# Altium PCB Power Supply PCB.PcbDoc
Units mm, origin at the board's own origin, x right, y up, seen from the top; angles counter-clockwise.
Board outline 116.46 x 103.76 mm, 2 copper layers (Top Layer, Bottom Layer); 60 components, 32 nets, 151 pads, 0 vias.
Unrouted connection lines stored in the file: 14.
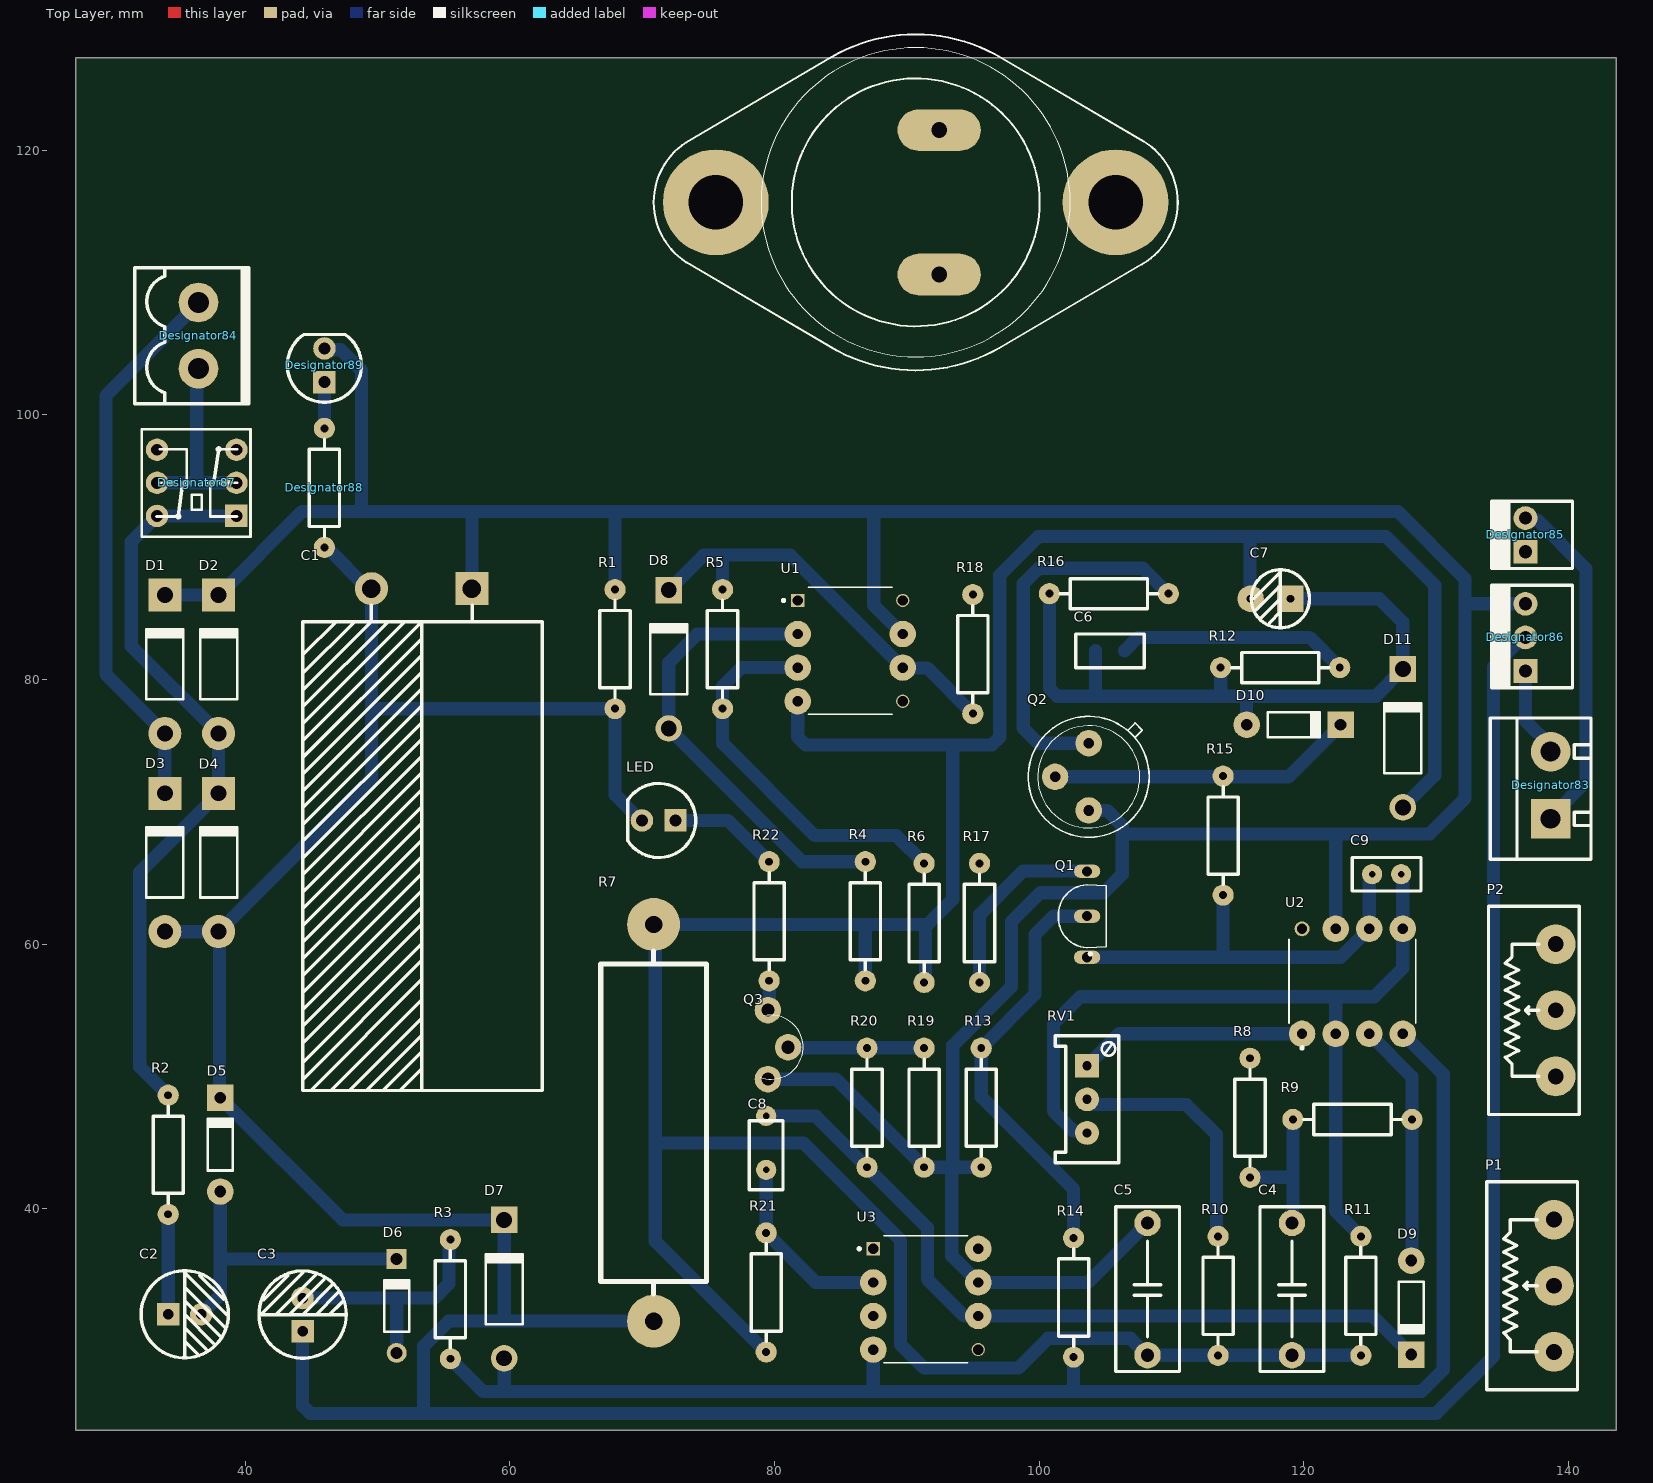
[diagram p0: Top Layer view]
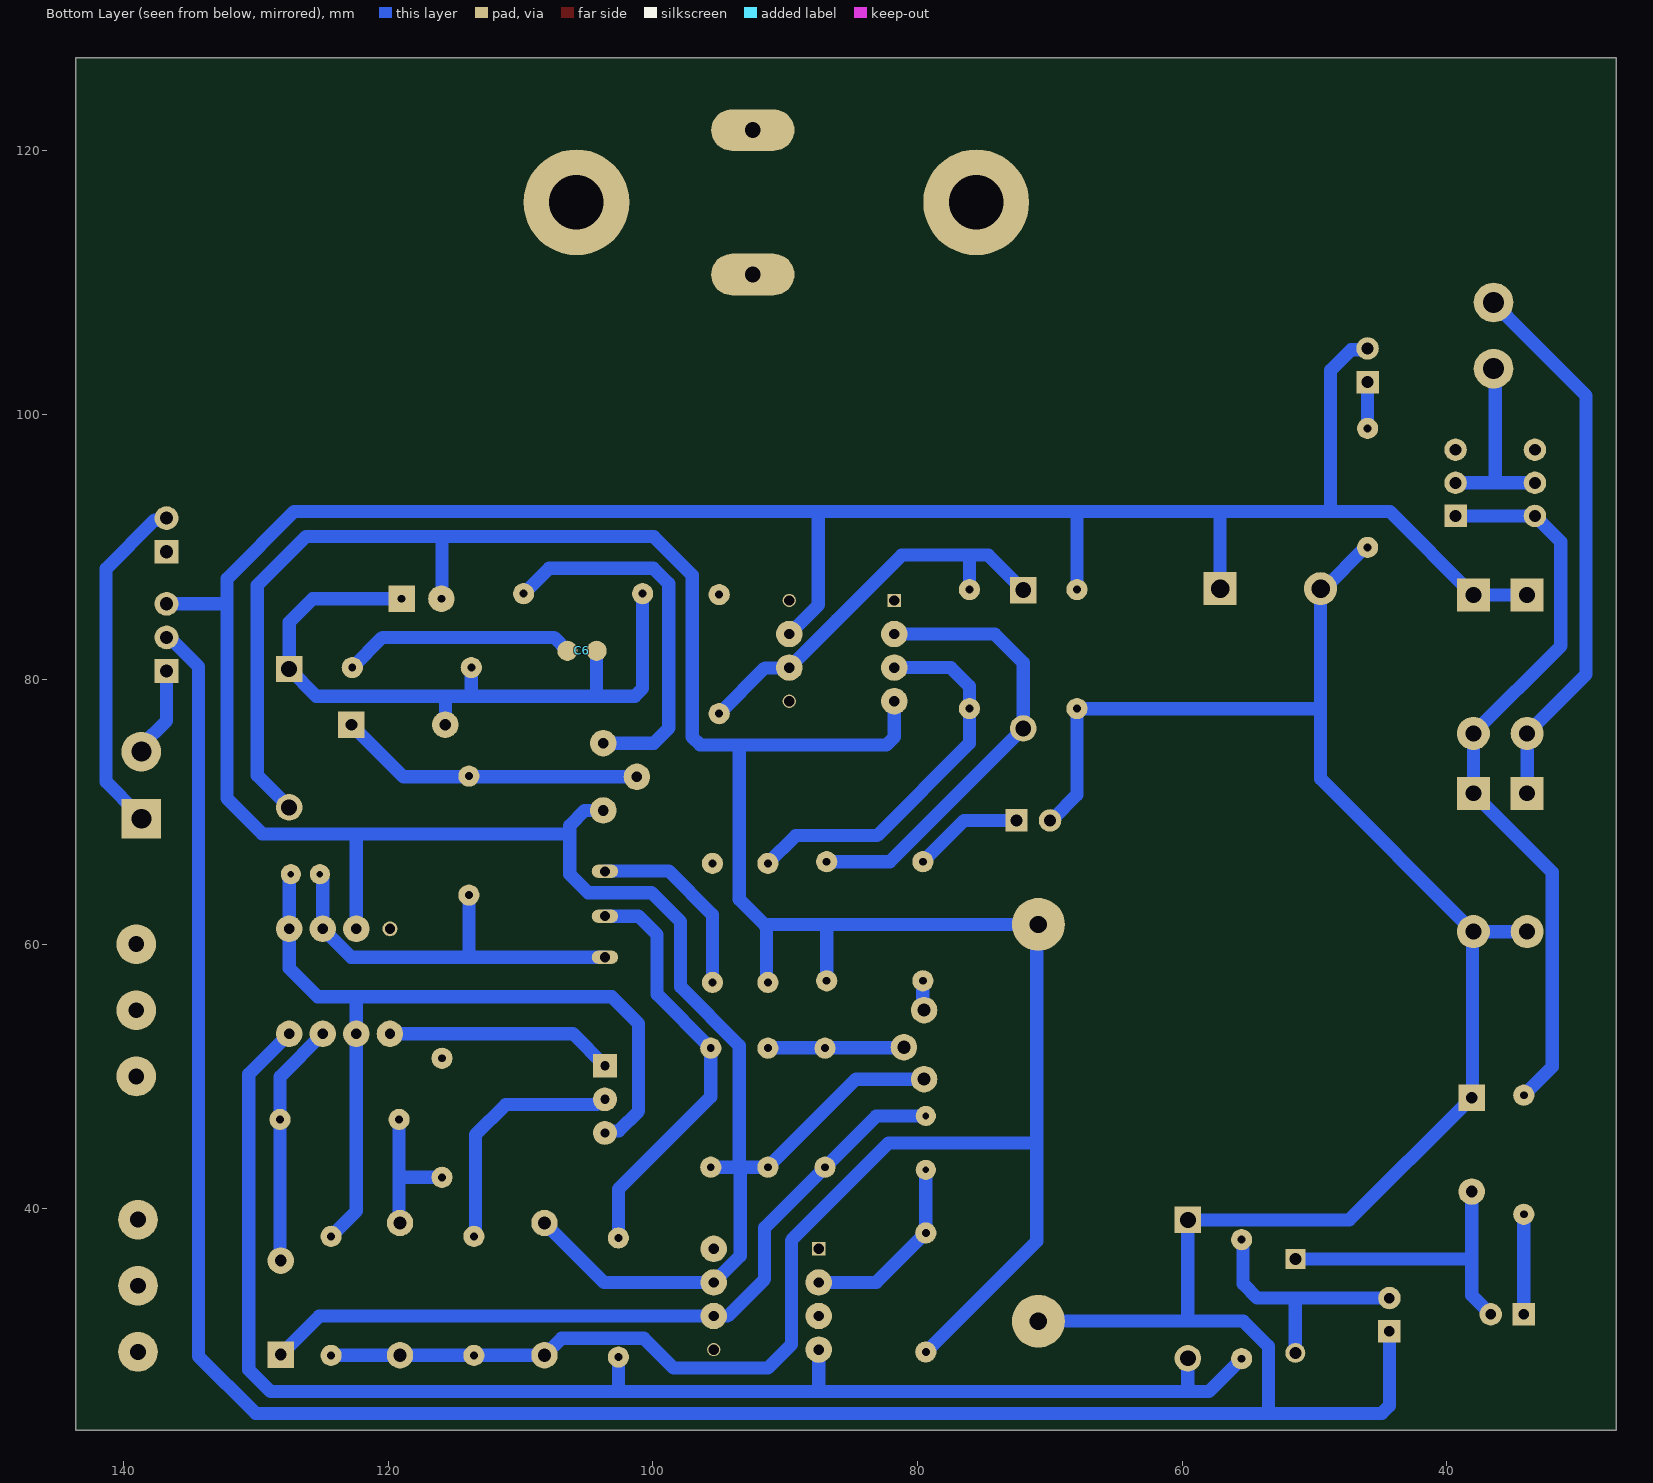
[diagram p1: Bottom Layer view, seen from below]

## Layer stack, top to bottom
Top Solder: solder mask 0.0102, Solder Resist, Dk 3.5
Top Layer: signal copper 0.0356
Dielectric 1: dielectric 0.32, FR-4, Dk 4.8
Bottom Layer: signal copper 0.0356
Bottom Solder: solder mask 0.0102, Solder Resist, Dk 3.5

## Board outline
27.178,23.241 143.637,23.241 143.637,127 27.178,127

## Design rules (kind name [scope] priority, off if disabled: settings)
Clearance [All] p1: gap=0.381 ignorepadtopadclearanceinfootprint=FALSE except(0.127: Track-SMDPad Track-THPad SMDPad-SMDPad SMDPad-THPad THPad-THPad Region-Region)
PolygonConnect [All] p1: connectstyle=Relief reliefconductorwidth=0.254 reliefentries=4 polygonreliefangle="90 Angle" airgapwidth=0.254
RoutingVias [All] p1: holewidth=0.711 width=1.27 viastyle="Through Hole" minholewidth=0.711 minwidth=1.27 maxholewidth=0.711 maxwidth=1.27
SolderMaskExpansion [All] p1: expansion=0.102 istentingtop=FALSE
Width [All] p1: maxlimit=2 minlimit=0.5 preferedwidth=1
30 further rules are at their usual default settings.

## Classes and differential pairs
component class Sheet1: C1 C2 C3 C4 C5 C6 C7 C8 C9 D1 D2 D3 D4 D5 D6 D7 D8 D9 D10 D11 LED P1 P2 Q1 Q2 Q3 Q4 R1 R2 R3 R4 R5 R6 R7 R8 R9 R10 R11 R12 R13 R14 R15 R16 R17 R18 R19 R20 R21 R22 RV1 U1 U2 U3

## Components (designator, comment, footprint, x,y, rotation, side; value= is the part's Value field where it differs from the comment)
C1 "3300uF/50V" "CAP 7.5*18*35.5-H - GD" 53.33,86.906 r180 top
C2 "47uF/50V" "CAP 2.5*6.3*7" 35.413,32.004 r0 top
C3 "47uF/50V" "CAP 2.5*6.3*7" 44.323,31.984 r90 top
C4 "100nF///" "CBB 10*12*8" 119.126,33.909 r90 top
C5 "220nF" "CBB 10*12*8" 108.204,33.909 r90 top
C6 "100pF" "CC 2.2*5"#1 104.267,82.169 r180 top
C7 "10uF/50V" "CAP 1.5*4*8" 118.249,86.106 r180 top
C8 "330pF///" "CC 2.2*5"#2 79.375,45.126 r90 top
C9 "100pF" "CC 2.2*5"#3 125.181,65.278 r180 top
D1 "1N5402,3,4,5,6,7,8" DO-41#1 33.909,81.153 r90 top
D2 "1N5402,3,4,5,6,7,8" DO-41#1 37.973,81.153 r90 top
D3 "1N5402,3,4,5,6,7,8" DO-41#1 33.909,66.167 r90 top
D4 "1N5402,3,4,5,6,7,8" DO-41#1 37.973,66.167 r90 top
D5 "1N4148" DO-35#1 38.1,44.831 r90 top
D6 "1N4148" DO-35#2 51.435,32.639 r90 top
D7 "5,6V Zener" DO-41#2 59.563,33.909 r90 top
D8 "5,6V Zener" DO-41#2 72.009,81.534 r90 top
D9 "1N4148" DO-35#1 128.143,32.512 r270 top
D10 "1N4148" DO-35#1 119.253,76.581 r0 top
D11 "1N4001" DO-41#2 127.508,75.565 r90 top
Designator83 "Comment" KF301-2P 138.684,69.469 r90 top
Designator84 "Comment" KF2EDGK-2P 36.449,108.505 r270 top
Designator85 "Comment" KF2510-2P 136.779,89.662 r90 top
Designator86 "Comment" KF2510-3P 136.779,80.645 r90 top
Designator87 "Comment" "KFT DIP-8X8" 36.322,94.869 r180 top
Designator88 "Comment" "RS 1/4W" 45.974,94.488 r90 top
Designator89 "Comment" "LED 5MM-R" 45.974,103.759 r90 top
LED "红色" "LED 5MM-R" 71.247,69.342 r180 top
P1 "=Value" WH148 138.938,34.163 r90 top
P2 "=Value" WH148 139.065,54.991 r90 top
Q1 "BC548" TO92127P520H533-3 103.632,62.103 r90 top
Q2 "2N2219" TO5 103.759,72.644 r180 top
Q3 "BC557B" TO127P254X732-3 81.026,50.927 r270 top
Q4 "2N3055" TO3 90.678,116.078 r180 top
R1 "2.2K" "RS 1/4W" 67.945,82.296 r90 top
R2 "82" "RS 1/4W" 34.163,44.069 r90 top
R3 "220" "RS 1/4W" 55.499,33.147 r90 top
R4 "4.7K" "RS 1/4W" 86.868,61.722 r90 top
R5 "10K" "RS 1/4W" 76.073,82.296 r90 top
R6 "10K" "RS 1/4W" 91.313,61.595 r90 top
R7 "0.47" "RS 5W" 70.866,46.482 r90 top
R8 "27K" "RS 1/4W" 115.951,46.863 r270 top
R9 "2.2K" "RS 1/4W" 123.698,46.736 r0 top
R10 "270K" "RS 1/4W" 113.538,33.401 r90 top
R11 "27K" "RS 1/4W" 124.333,33.401 r90 top
R12 "56K" "RS 1/4W" 118.237,80.899 r180 top
R13 "10K" "RS 1/4W" 95.631,47.625 r270 top
R14 "1.5K" "RS 1/4W" 102.616,33.274 r270 top
R15 "1K" "RS 1/4W" 113.919,68.199 r90 top
R16 "1K" "RS 1/4W" 105.283,86.487 r180 top
R17 "33" "RS 1/4W" 95.504,61.595 r90 top
R18 "56K" "RS 1/4W" 94.996,81.915 r270 top
R19 "2.2K" "RS 1/4W" 91.313,47.625 r270 top
R20 "10K" "RS 1/4W" 86.995,47.625 r90 top
R21 "10K" "RS 1/4W" 79.375,33.655 r270 top
R22 "3.9K" "RS 1/4W" 79.597,61.722 r270 top
RV1 "100K" 3296W 103.632,48.26 r270 top
U1 "TL081IP" DIP794W45P254L959H508Q8#1 85.725,82.169 r0 top
U2 "TL081IP" DIP794W45P254L959H508Q8#2 123.698,57.183 r90 top
U3 "TL081IP" DIP794W45P254L959H508Q8#3 91.44,33.147 r0 top

## Footprints (in the part's own frame and the unit in brackets; to place one, negate y for a bottom-side part, rotate by r counter-clockwise, add the part's x,y. Pads: shape width x height; smd on the part's side, far side on the other; paste and mask are expansions set on the pad)
3296W [mm] "Precise Multi-Winding Adjustable Resistor"
  rect 1.8x1.8 hole 0.7: 1(-2.54,0)
  round 1.8 hole 0.7: 2(2.54,0) ADJ(0,0)
  silkscreen extent -4.8,-2.4 4.8,2.4, body extent -4.75,-2.4 4.75,2.4, height 11.52
"CAP 1.5*4*8" [mm] "ï؟½إ¾ï؟½1.5mmض±ï؟½ï؟½4mmï؟½ك¶ï؟½8mm"
  rect 2x2 hole 0.6: 1(-0.75,0)
  round 2 hole 0.6: 2(2.249,0)
  silkscreen extent -2.2,-2.2 2.2,2.2, body extent -2,-2 2.02,2, height 8.04
"CAP 2.5*6.3*7" [mm] "ï؟½إ¾ï؟½2.5mmض±ï؟½ï؟½6.3mmï؟½ك¶ï؟½7mm"
  rect 1.7x1.7 hole 0.8: 1(-1.25,0)
  round 1.7 hole 0.8: 2(1.25,0)
  silkscreen extent -3.3,-3.3 3.3,3.3, body extent -3.15,-3.15 3.16,3.15, height 7.03
"CAP 7.5*18*35.5-H - GD" [mm] "ï؟½إ¾ï؟½7.5mmض±ï؟½ï؟½18mmï؟½ك¶ï؟½35.5mm"
  rect 2.5x2.5 hole 1.4: 1(-3.8,0.038)
  round 2.5 hole 1.4: 2(3.8,0.038)
  silkscreen extent -9.12,1.27 9.01,37.98, body extent -9.05,-0.46 8.96,37.95, height 18.03
"CBB 10*12*8" [mm] "ï؟½إ¾ï؟½10mmï؟½ï؟½12mmï؟½ï؟½8mm"
  round 2 hole 1: 1(-5,0) 2(5,0)
  silkscreen extent -6.22,-2.41 6.22,2.41, body extent -6,-2.25 6,2.25, height 8.53
"CC 2.2*5"#1 [mil] "ï؟½إ¾ï؟½2.2mmض±ï؟½ï؟½5mm"
  round 60 smd far side: 1(-86.61,0) 2(0,0)
  silkscreen extent -146,-50 59,50, body extent -138,-36 51,36, height 189
"CC 2.2*5"#2 [mil] "ï؟½إ¾ï؟½2.2mmض±ï؟½ï؟½5mm"
  round 60 hole 19.68: 1(-86.61,0) 2(73.78,0)
  silkscreen extent -146,-50 59,50, body extent -138,-36 51,36, height 189
"CC 2.2*5"#3 [mil] "ï؟½إ¾ï؟½2.2mmض±ï؟½ï؟½5mm"
  round 60 hole 19.68: 1(-86.61,0) 2(0,0)
  silkscreen extent -146,-50 59,50, body extent -138,-36 51,36, height 189
DIP794W45P254L959H508Q8#1 [mm]
  rect 1x1 hole 0.78: 1(-3.97,3.81)
  round 2 hole 0.78: 2(-3.97,1.27) 3(-3.97,-1.27) 4(-3.97,-3.81) 6(3.97,-1.27) 7(3.97,1.27)
  round 1 hole 0.78: 5(3.97,-3.81) 8(3.97,3.81)
  silkscreen extent -5.13,-4.79 3.17,4.79, body extent -3.94,-4.54 3.94,5.05, height 5.08
DIP794W45P254L959H508Q8#2 [mm]
  round 2 hole 0.78: 1(-3.97,3.81) 2(-3.97,1.27) 3(-3.97,-1.27) 4(-3.97,-3.81) 5(3.97,-3.81) 6(3.97,-1.27) 7(3.97,1.27)
  round 1.13 hole 0.78: 8(3.97,3.81)
  silkscreen extent -5.13,-4.79 3.18,4.79, body extent -3.94,-4.54 3.94,5.05, height 5.08
DIP794W45P254L959H508Q8#3 [mm]
  rect 1x1 hole 0.78: 1(-3.97,3.81)
  round 2 hole 0.78: 2(-3.97,1.27) 3(-3.97,-1.27) 4(-3.97,-3.81) 6(3.97,-1.27) 7(3.97,1.27) 8(3.97,3.81)
  round 1 hole 0.78: 5(3.97,-3.81)
  silkscreen extent -5.13,-4.79 3.17,4.79, body extent -3.94,-4.54 3.94,5.05, height 5.08
DO-35#1 [mm] "Diode, Axial; Body 3.8 x 1.9 mm (LxDia. max), Lead Dia. 0.53 mm (max)"
  round 2 hole 0.9: 1(-3.55,0)
  rect 2x2 hole 0.9: 2(3.55,0)
  silkscreen extent -1.95,-0.95 2.05,0.95
DO-35#2 [mm] "Diode, Axial; Body 3.8 x 1.9 mm (LxDia. max), Lead Dia. 0.53 mm (max)"
  round 1.5 hole 0.9: 1(-3.55,0)
  rect 1.5x1.5 hole 0.9: 2(3.55,0)
  silkscreen extent -1.95,-0.95 2.05,0.95
DO-41#1 [mm] "Diode, Axial; Body 5.2 x 2.7 mm (LxDia. max), Lead Dia. 0.86 mm (max)"
  round 2.5 hole 1.2: 1(-5.23,0)
  rect 2.5x2.5 hole 1.2: 2(5.23,0)
  silkscreen extent -2.65,-1.4 2.75,1.4
DO-41#2 [mm] "Diode, Axial; Body 5.2 x 2.7 mm (LxDia. max), Lead Dia. 0.86 mm (max)"
  round 2 hole 1.2: 1(-5.23,0)
  rect 2x2 hole 1.2: 2(5.23,0)
  silkscreen extent -2.65,-1.4 2.75,1.4
KF2EDGK-2P [mm] "ض±ءذ²ه°خت½¶ث×س"
  round 3 hole 1.6: 1(0,0) 2(5,0)
  silkscreen extent -2.62,-4.83 7.67,3.81, body extent -2.54,-4.75 7.54,3.75, height 11.25
KF301-2P [mm] "؟ةئ´½س¶ث×س/6A"
  rect 3x3 hole 1.5: 1(0,0)
  round 3 hole 1.5: 2(5.08,0)
  silkscreen extent -3.05,-3.05 7.62,4.57, body extent -2.87,-3 7.63,4.6, height 10.05
KF2510-2P [mm] "½س²ه¼‏/2A"
  rect 1.8x1.8 hole 1: 1(0,0)
  round 1.8 hole 1: 2(2.54,0)
  silkscreen extent -1.32,-3.56 3.81,2.54, body extent -1.27,-3.5 3.81,2.4, height 11.05
KF2510-3P [mm] "½س²ه¼‏/2A"
  rect 1.8x1.8 hole 1: 1(0,0)
  round 1.8 hole 1: 2(2.54,0) 3(5.08,0)
  silkscreen extent -1.27,-3.56 6.48,2.54, body extent -1.27,-3.5 6.35,2.4, height 11.05
"KFT DIP-8X8" [mm] "8*8mmï؟½ï؟½ï؟½ï؟½"
  rect 1.7x1.7 hole 0.9: 1(-3,2.5)
  round 1.7 hole 0.9: 2(-3,0) 3(-3,-2.5) 4(3,-2.5) 5(3,0) 6(3,2.5)
  silkscreen extent -4.06,-4.06 4.15,4.06, body extent -3.95,-4.05 4.05,3.95, height 13.1
"LED 5MM-R" [mm] "ï؟½ï؟½ة«5mmض±ï؟½ï؟½LED"
  rect 1.7x1.7 hole 0.9: 1(-1.27,0)
  round 1.7 hole 0.9: 2(1.27,0)
  silkscreen extent -2.8,-2.8 2.33,2.8, body extent -2.85,-2.85 2.45,2.85, height 8.75
"RS 1/4W" [mm] "ض±ï؟½ï؟½ة«ï؟½ï؟½ï؟½ï؟½ï؟½è£¬ï؟½إ¾ï؟½9mmï؟½ï"
  round 1.6 hole 0.6: 1(-4.5,0) 2(4.5,0)
  silkscreen extent -3.68,-1.14 3.68,1.14, body extent -4.72,-1.16 4.73,1.16, height 2.32
"RS 5W" [mm] "ض±ï؟½ï؟½ة«ï؟½ï؟½ï؟½ï؟½ï؟½è£¬ï؟½إ¾ï؟½30mmï؟½ï"
  round 4 hole 1.3: 1(-15,0) 2(15,0)
  silkscreen extent -12.92,-4 13,4, body extent -15.5,-4.01 15.5,4.01, height 8.11
TO3 [mil]
  oval 248x124 hole 47: B(-70,215) E(-70,-215)
  round 314.96 hole 162: C(595,0) C/(-595,0)
  silkscreen extent -780,-500 780,500, body extent -766,-502 766,502, height 351
TO5 [mm]
  round 2 hole 0.813: 1(0,-2.54) 2(2.54,0) 3(0,2.54)
  silkscreen extent -4.57,-4.57 4.57,4.57, body extent -4.57,-4.57 4.57,4.57, height 6.6
TO127P254X732-3 [mm]
  round 2 hole 0.991: 1(-4.073,-1.524) 2(-1.27,0) 3(1.143,-1.524)
  silkscreen extent -3.7,-2.1 1.14,1.14, body extent -3.56,-2.98 1.27,0.7, height 5.34
TO92127P520H533-3 [mm]
  oval 1x2 hole 0.76: 1(-3.103,0) 2(0,0) 3(3.397,0)
  silkscreen extent -2.95,-1.46 2.38,2.16, body extent -2.41,-1.52 2.41,2.16, height 5.34
WH148 [mm] "ï؟½ï؟½ï؟½ï؟½ï؟½ï؟½ï؟½إµï؟½خ»ï؟½ï؟½"
  round 3 hole 1.2: 1(-5,0) 2(5,0) ADJ(0,0)
  silkscreen extent -7.87,-1.78 7.87,5.08, body extent -7.87,-20.58 7.87,4.98, height 20.04

## Part data
C1 C2 C3 C7: library part C-CAP, "Inline electrolytic capacitor", BOM名称=直插电解电容, 学习资源=www.ooocke.com, 版权归属=源创客
C4 C5: library part C-CBB, "CBB capacitor", BOM名称=CBB电容, 学习资源=www.ooocke.com, 版权归属=源创客
C6 C8 C9: library part C-CC, "Straight insert ceramic capacitor", BOM名称=直插瓷片电容, 学习资源=www.ooocke.com, 版权归属=源创客
D1 D2 D3 D4 D7 D8 D11: library part 1N4007, "Rectifier diode", BOM名称=整流二极管, 学习资源=www.ooocke.com, 版权归属=源创客
D5 D6 D9 D10: "High speed switching diode", BOM名称=高速开关二极管, 学习资源=www.ooocke.com, 版权归属=源创客
LED: library part LED-5MM, "5mm plug-in LED", BOM名称=5mm插件LED, 学习资源=www.ooocke.com, 版权归属=源创客
P1 P2 RV1: library part RP-THD, "Plug-in potentiometer", BOM名称=插件电位器, 学习资源=www.ooocke.com, 版权归属=源创客
Q1: "Bipolar (BJT) Transistor NPN 30V 100mA 300MHz 500mW Through Hole TO-92-3", Package="TO-92 ON Semiconductor", Availability=Warning, DigiKey-Purchase-URL=https://snapeda.com/shop?store=DigiKey&id=2007035, MF="ON Semiconductor", MP=BC548, Price=None, SnapEDA_Link=https://www.snapeda.com/parts/BC548/ON%20Semiconductor/view-part/2007035/?ref=snap
Q2: "Bipolar _BJT_ Transistor NPN 30V 800mA 800mW Through Hole TO-39 _TO-205AD_", Package="TO-39 Microsemi", Availability=Unavailable, MF=Microsemi, MP=2N2219, Price=None, SnapEDA_Link=https://www.snapeda.com/parts/2N2219/Microsemi/view-part/4701669/?ref=snap
Q3: "Tranzistor bipolar _BJT_ PNP 45V 100mA 320MHz 625mW Gura de trecere TO-92-3", Package="TO-226-3 Diotec Semiconductor", Availability=Unavailable, MF="Diotec Semiconductor", MP=BC557B, Price=None, SnapEDA_Link=https://www.snapeda.com/parts/BC557B/Diotec/view-part/4702102/?ref=snap
Q4: "Bipolar _BJT_ Transistor NPN 60V 15A 2.5MHz 115W Through Hole TO-3", Package="TO-3 RCA", Availability=Unavailable, MF=STMicroelectronics, MP=2N3055, Price=None, SnapEDA_Link=https://www.snapeda.com/parts/2N3055/STMicroelectronics/view-part/2753103/?ref=snap
R1 R2 R3 R4 R5 R6 R7 R8 R9 R10 R11 R12 R13 R14 R15 R16 R17 R18 R19 R20 R21 R22: library part R-CRR, "Straight color ring resistor", BOM名称=色环电阻, 学习资源=www.ooocke.com, 版权归属=源创客
U1 U2 U3: "Amplificador operacional de entrada JFET de alta velocidad de respuesta 8-PDIP -40 a 85", Package="PDIP-8 Texas", Availability=Good, Check_prices=https://www.snapeda.com/parts/TL081IP/Texas%20Instruments/view-part/558008/?ref=eda, MF="Texas Instruments", MP=TL081IP, Price=None, Purchase-URL=https://pricing.snapeda.com/search/part/TL081IP/?ref=eda, SnapEDA_Link=https://www.snapeda.com/parts/TL081IP/Texas%20Instruments/view-part/558008/?ref=snap

## Nets (pads, with @x,y where several pads share a name; then routed paths per layer and width w, separated by ;. In a path a pad name is that pad's centre, name@x,y a point inside that pad or via, vN(x,y) a via of type N, cw(c..) or ccw(c..) an arc to the next point about the centre after c; other vN are vias at no path point)
+30: C6.2 C7.1 D10.1 D11.2 Designator83.2 Designator86.1 Q4.E R12.2 R16.2 | length 62.4
  Bottom Layer w1: R16.2 100.783,79.326 101.369,78.74 104.267,78.74 ; C6.2 104.267,78.74 ; R12.2 113.737,78.74 ; D10.1@115.697,76.559 115.697,78.74 ; C7.1 125.73,86.106 127.508,84.328 D11.2 125.453,78.74 115.697,78.74 ; Designator86.1 136.779,76.887 138.684,74.982 Designator83.2 ; 104.267,78.74 113.737,78.74 ; 113.737,78.74 115.697,78.74
IN+_U1: R5.1 R6.2 U1.3 | length 29.6
  Bottom Layer w1: U1.3 77.47,80.899 76.073,79.502 76.073,75.184 83.058,68.199 89.209,68.199 R6.2
IN+_U2: D9.1 R9.2 U2.3 | length 18.6
  Bottom Layer w1: U2.3 128.198,49.983 R9.2 128.198,36.261 D9.1@128.397,36.062
IN+_U3: P2.ADJ U3.3
IN-_U1: D8.1 R4.2 U1.2 | length 34.7
  Bottom Layer w1: U1.2 74.168,83.439 72.009,81.28 D8.1 82.091,66.222 R4.2
IN-_U2: C6.1 C9.1 R11.2 R12.1 RV1.2 U2.2 U2.5 | length 81.8
  Bottom Layer w1: RV1.2 103.479,45.873 102.59,45.873 101.092,47.371 101.092,53.975 103.124,56.007 121.969,56.007 ; C6.1 107.483,83.185 120.451,83.185 R12.1 ; 121.805,56.007 122.428,56.007 ; R11.2 122.428,39.806 U2.2 122.428,56.007 ; C9.1 127.381,65.136 127.508,65.009 U2.5 127.508,58.166 125.349,56.007 122.428,56.007
IN-_U3: C8.1 R21.1 U3.2 | length 14.4
  Bottom Layer w1: C8.1 R21.1 83.113,34.417 U3.2
NetC1_2: C1.2 C3.1 D3.1 D4.1 D5.2 D7.2 Designator86.2 Designator88.1 LED.2 Q1.3 R1.1 R7.1 R17.1 | length 303.8
  Bottom Layer w1: D3.1 D4.1 ; C3.1 44.323,25.097 44.909,24.511 53.467,24.511 ; Designator88.1 46.136,89.988 49.256,86.868 C1.2 49.53,77.796 ; 59.563,31.496 D7.2 47.342,39.139 38.35,48.131 38.036,48.445 38.036,60.874 D4.1 ; LED.2@69.754,69.476 67.945,71.285 R1.1 49.53,77.796 ; R7.1 70.852,31.496 55.372,31.496 53.467,29.591 53.467,24.511 ; R17.1 95.504,62.23 98.806,65.532 103.1,65.532 103.132,65.5 Q1.3 ; Designator86.2 136.563,83.185 134.366,80.988 134.366,28.829 130.048,24.511 53.467,24.511 ; D4.1 49.53,72.494 49.53,77.796
NetC2_1: C2.1 R2.1 | length 7.6
  Bottom Layer w1: C2.1 R2.1
NetC2_2: C2.2 D5.1 D6.2 | length 23.2
  Bottom Layer w1: C2.2 38.1,33.441 38.1,36.189 ; D5.1 38.1,36.189 ; D6.2 38.1,36.189
NetC3_2: C3.2 D6.1 R3.2 | length 19
  Bottom Layer w1: C3.2 51.435,33.234 ; D6.1 51.435,33.234 ; R3.2 55.384,37.532 55.384,34.302 54.316,33.234 51.435,33.234
NetC4_2: C4.2 R8.2 R9.1 | length 11.1
  Bottom Layer w1: R8.2 119.198,42.363 ; C4.2 119.198,38.981 119.198,42.363 ; R9.1 119.198,42.363
NetD1_1: D1.1 D3.2 Designator84.1 | length 41.8
  Bottom Layer w1: D3.2 D1.1 29.464,80.368 29.464,101.473 35.449,107.458 35.449,107.505 Designator84.1
NetD2_1: D2.1 D4.2 Designator87.1 Designator87.6 R2.2 | length 56.7
  Bottom Layer w1: R2.2 32.004,50.728 32.004,65.428 D4.2 D2.1 31.369,82.527 31.369,90.416 Designator87.6 Designator87.1
NetD10_2: D10.2 Q2.2 R15.2 | length 23.2
  Bottom Layer w1: Q2.2 113.919,72.644 118.866,72.644 122.553,76.331 D10.2
NetLED_1: LED.1 R22.1 | length 8.4
  Bottom Layer w1: LED.1 76.477,69.342 R22.1
NetP1_ADJ: P1.ADJ R8.1
NetP2_1: P2.1 R18.1
NetP2_2: P2.2 R17.2
NetQ1_2: Q1.2 R13.1 R14.1 | length 32
  Bottom Layer w1: R14.1 102.616,41.457 95.631,48.442 R13.1 99.695,56.189 99.695,60.706 101.092,62.103 Q1.2
NetQ2_1: Q2.1 Q4.B R16.1 | length 28.6
  Bottom Layer w1: Q2.1 99.949,75.184 98.806,76.327 98.806,87.249 99.965,88.408 107.862,88.408 R16.1
NetQ3_1: Q3.1 R22.2 | length 2.2
  Bottom Layer w1: Q3.1@79.597,55.011 R22.2
NetQ3_2: Q3.2 R19.1 R20.2 | length 10.3
  Bottom Layer w1: Q3.2 81.062,52.161 86.995,52.161 91.277,52.161 R19.1
NetR10_2: R10.2 RV1.ADJ | length 18.6
  Bottom Layer w1: RV1.ADJ 103.848,48.26 104.248,47.86 111.144,47.86 113.423,45.581 113.423,38.016 R10.2
NewNet1: Designator83.1 Designator85.2 | length 26.5
  Bottom Layer w1: Designator85.2 136.932,92.049 137.694,92.049 141.351,88.392 141.351,72.263 138.938,69.85 Designator83.1@138.938,69.088
OFSSET1_U2: RV1.1 U2.1 | length 17.3
  Bottom Layer w1: RV1.1 106.045,53.213 U2.1
OUT_U1: D8.2 P1.2 R5.2 R18.2 U1.6 | length 31.7
  Bottom Layer w1: D8.2 74.653,89.408 76.073,89.408 ; R5.2 76.073,88.773 76.073,89.408 ; R18.2 91.537,80.874 89.72,80.874 U1.6 86.122,84.472 81.186,89.408 76.073,89.408
OUT_U2: C9.2 Q1.1 R15.1 U2.6 | length 31.3
  Bottom Layer w1: Q1.1 113.792,59 ; R15.1 113.919,59.127 113.792,59 ; C9.2@125.208,65.375 125.208,65.163 124.968,64.923 U2.6 122.815,59 113.792,59
OUT_U3: C8.2 D9.2 R20.1 U3.6 | length 58.8
  Bottom Layer w1: C8.2@79.133,46.99 83.13,46.99 R20.1 91.567,38.553 91.567,34.671 94.361,31.877 U3.6 125.228,31.877 D9.2
VCC+: C1.1 C5.2 D1.2 D2.2 Designator86.3 Designator89.2 Q2.3 Q3.3 Q4.C Q4.C/ R1.2 R13.2 R19.2 U1.7 U2.7 U3.7 | length 274.6
  Bottom Layer w1: D1.2 D2.2 44.3,92.71 48.768,92.71 ; Designator89.2 46.064,104.939 47.207,104.939 48.768,103.378 48.768,92.71 ; C1.1 57.13,92.436 57.404,92.71 ; R1.2 67.945,92.71 ; Q3.3 84.654,49.784 R19.2 93.406,43.125 93.406,36.421 U3.7 103.712,34.417 C5.2 ; U1.7 87.503,85.631 87.503,92.583 87.63,92.71 ; R13.2 93.472,43.125 93.472,52.324 97.917,56.769 97.917,61.692 100.106,63.881 104.902,63.881 106.299,65.278 106.299,68.326 ; Q2.3 105.156,70.104 106.299,68.961 106.299,68.326 ; U2.7 122.428,68.072 122.555,68.199 ; Designator86.3 132.207,85.725 ; 48.768,92.71 57.404,92.71 ; 57.404,92.71 67.945,92.71 ; 67.945,92.71 87.63,92.71 ; 87.63,92.71 127.127,92.71 132.207,87.63 132.207,85.725 ; 106.299,68.326 122.428,68.326 129.54,68.326 132.207,70.993 132.207,85.725
VCC-: D7.1 R3.1 R14.2 U2.4 U3.4 | length 112
  Bottom Layer w1: R3.1 57.984,26.162 59.182,26.162 ; D7.1 59.563,26.543 59.182,26.162 ; U3.4 87.47,26.162 ; R14.2 102.616,26.416 102.362,26.162 ; U2.4 130.556,50.165 130.556,27.813 128.905,26.162 102.362,26.162 ; 59.182,26.162 59.563,26.162 87.47,26.162 ; 87.47,26.162 102.362,26.162
VCC-_2: C4.1 C5.1 C7.2 D11.1 Designator85.1 P1.1 R4.1 R6.1 R7.2 R10.1 R11.1 R21.2 U1.4 | length 232.5
  Bottom Layer w1: R7.2 91.581,61.482 93.472,63.373 93.472,75.057 ; R7.2@70.993,59.704 70.993,44.958 ; R21.2 70.993,37.537 70.993,44.958 ; U1.4 81.755,75.643 82.341,75.057 93.472,75.057 ; R4.1 86.868,60.966 ; R6.1 91.422,57.204 91.422,61.341 ; C7.2 115.962,86.144 115.962,86.286 115.951,86.296 115.951,90.805 ; R11.1 124.329,28.905 118.876,28.905 118.872,28.909 113.538,28.909 C5.1 106.912,30.201 100.686,30.201 98.425,27.94 91.313,27.94 89.535,29.718 89.535,37.592 82.169,44.958 70.993,44.958 ; D11.1 129.921,72.748 129.921,87.122 126.238,90.805 115.951,90.805 ; 93.472,75.057 96.442,75.057 97.028,75.643 97.028,87.884 99.949,90.805 115.951,90.805
pads on no net: Designator84.2 Designator87.2 Designator87.3 Designator87.4 Designator87.5 Designator88.2 Designator89.1 U1.1 U1.5 U1.8 U2.8 U3.1 U3.5 U3.8
copper on no net: | length 17.5
  Bottom Layer w1: 33.322,94.869 39.322,94.869 ; 36.322,94.869 36.322,102.823 ; 45.974,98.988 45.974,102.489

## Silkscreen, mask and mechanical layers (free items; w line width, h text height)
Mechanical 1:
  lines w0.254: 63.52,103.171 63.525,103.679 ; 65.041,102.902 63.523,103.425 ; 65.052,103.917 63.523,103.425 ; 80.899,103.251 63.523,103.425 ; 96.946,103.091 114.323,102.917 ; 112.794,102.424 114.323,102.917 ; 112.804,103.44 114.323,102.917 ; 113,104.892 113.538,103.378 ; 113.284,103.373 113.792,103.383 ; 113.314,88.89 113.792,90.424 ; 113.488,105.918 113.538,103.378 ; 113.538,90.419 114.046,90.429 ; 113.842,87.884 113.792,90.424 ; 114.016,104.912 113.538,103.378 ; 114.32,102.663 114.325,103.171 ; 114.33,88.91 113.792,90.424
  text "12.956 (mm)" at 109.859,104.471 h1.52 r271.12
  text "50.803 (mm)" at 81.144,102.334 h1.52 r359.43

## Text inside footprints (layer, text, board x,y; h text height)
Q4: Mechanical 13 "C" at 75.412,121.039 h1.3 r180; Mechanical 13 "E" at 94.493,122.308 h1.3 r180; Mechanical 13 "B" at 94.495,111.498 h1.3 r180